# Altium PCB Switch Matrix PCB.PcbDoc (part 1 of 3)
Units mil, origin at the board's own origin, x right, y up, seen from the top; angles counter-clockwise.
Board outline 3937.01 x 7874.02 mil, 2 copper layers (Top Layer, Bottom Layer), stack 62.8 mil thick; 178 components, 222 nets, 852 pads, 317 vias.
Unrouted connection lines stored in the file: 1.
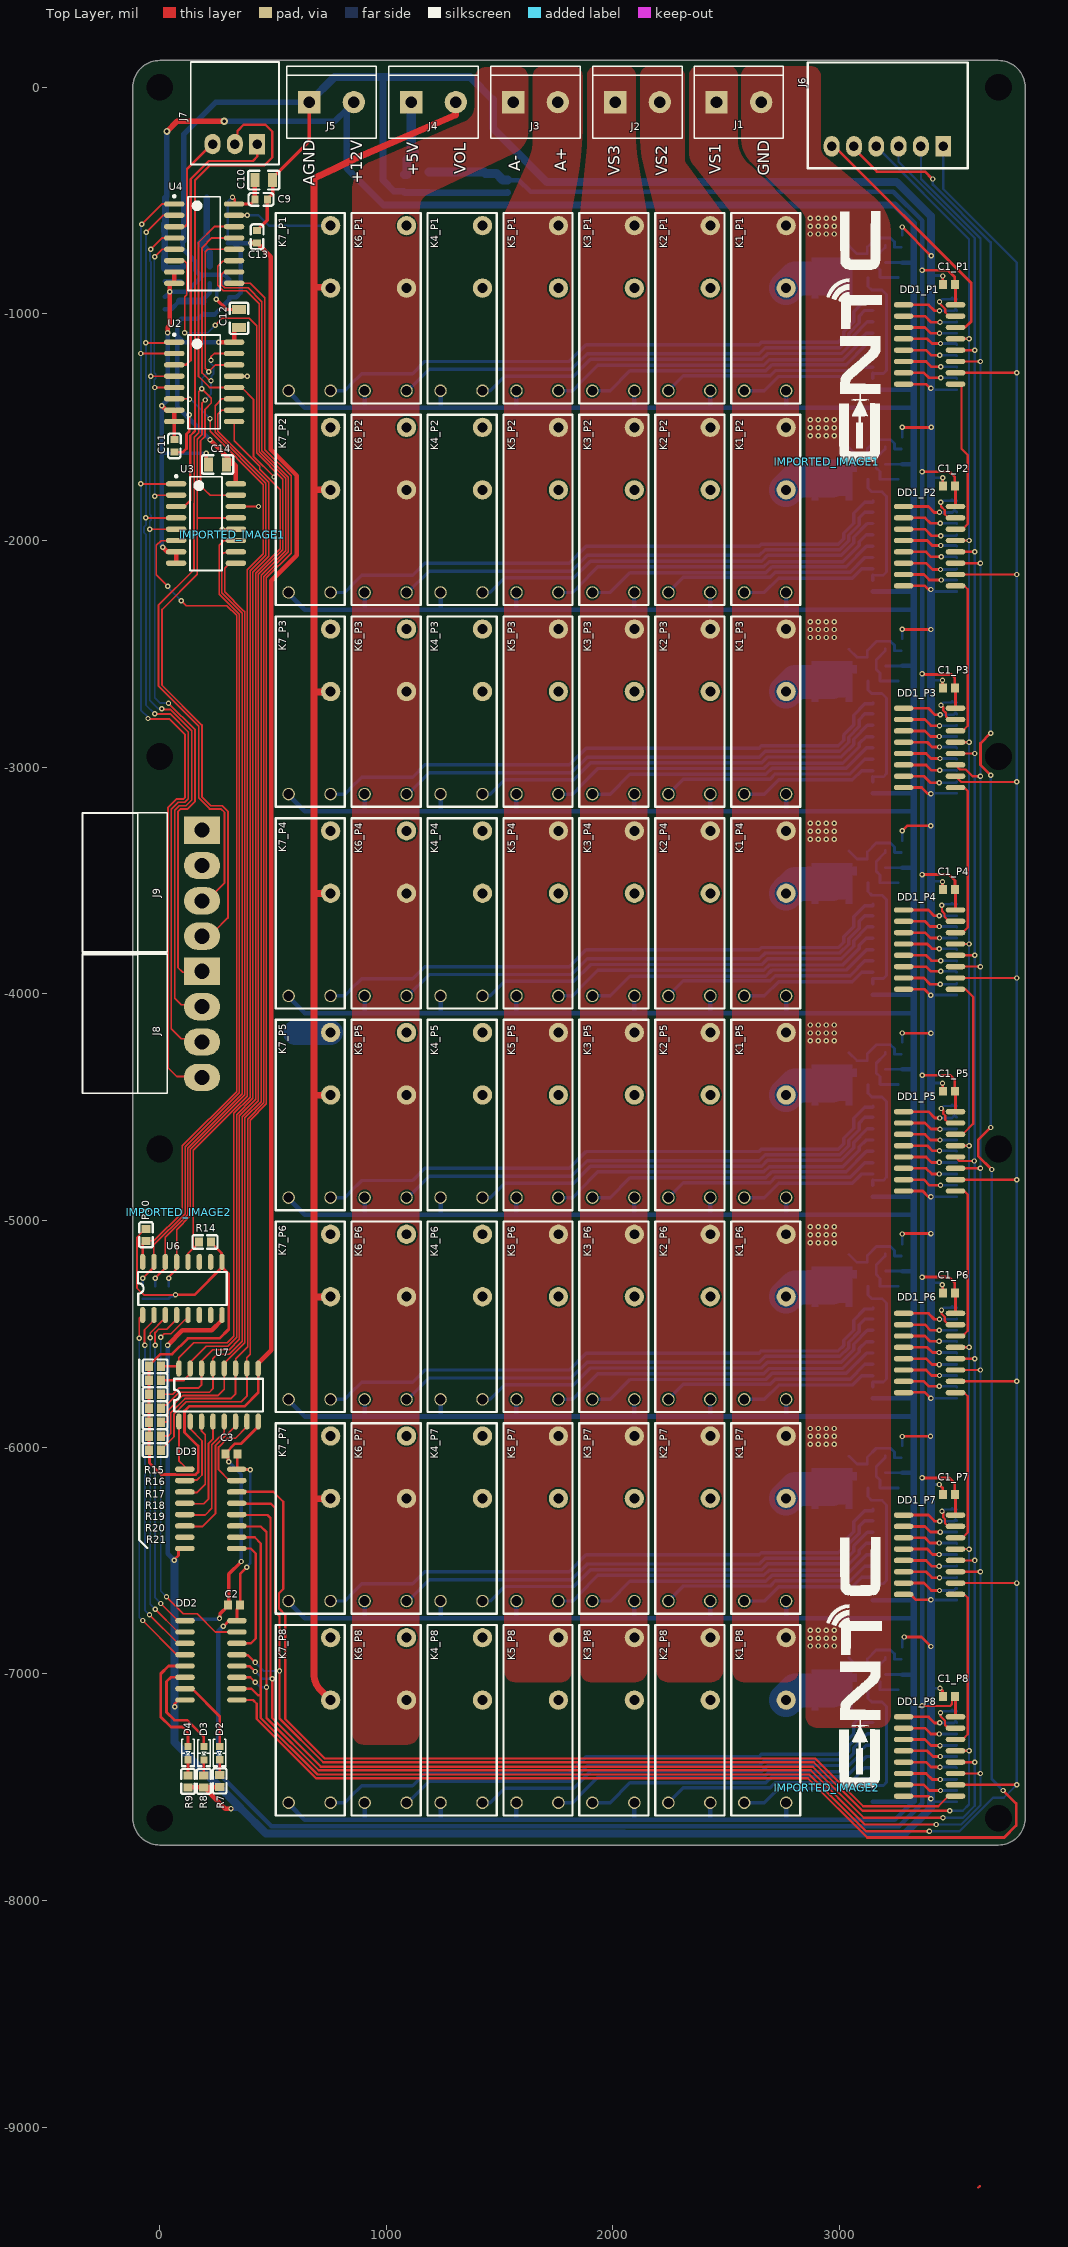
[diagram p0: Top Layer view]
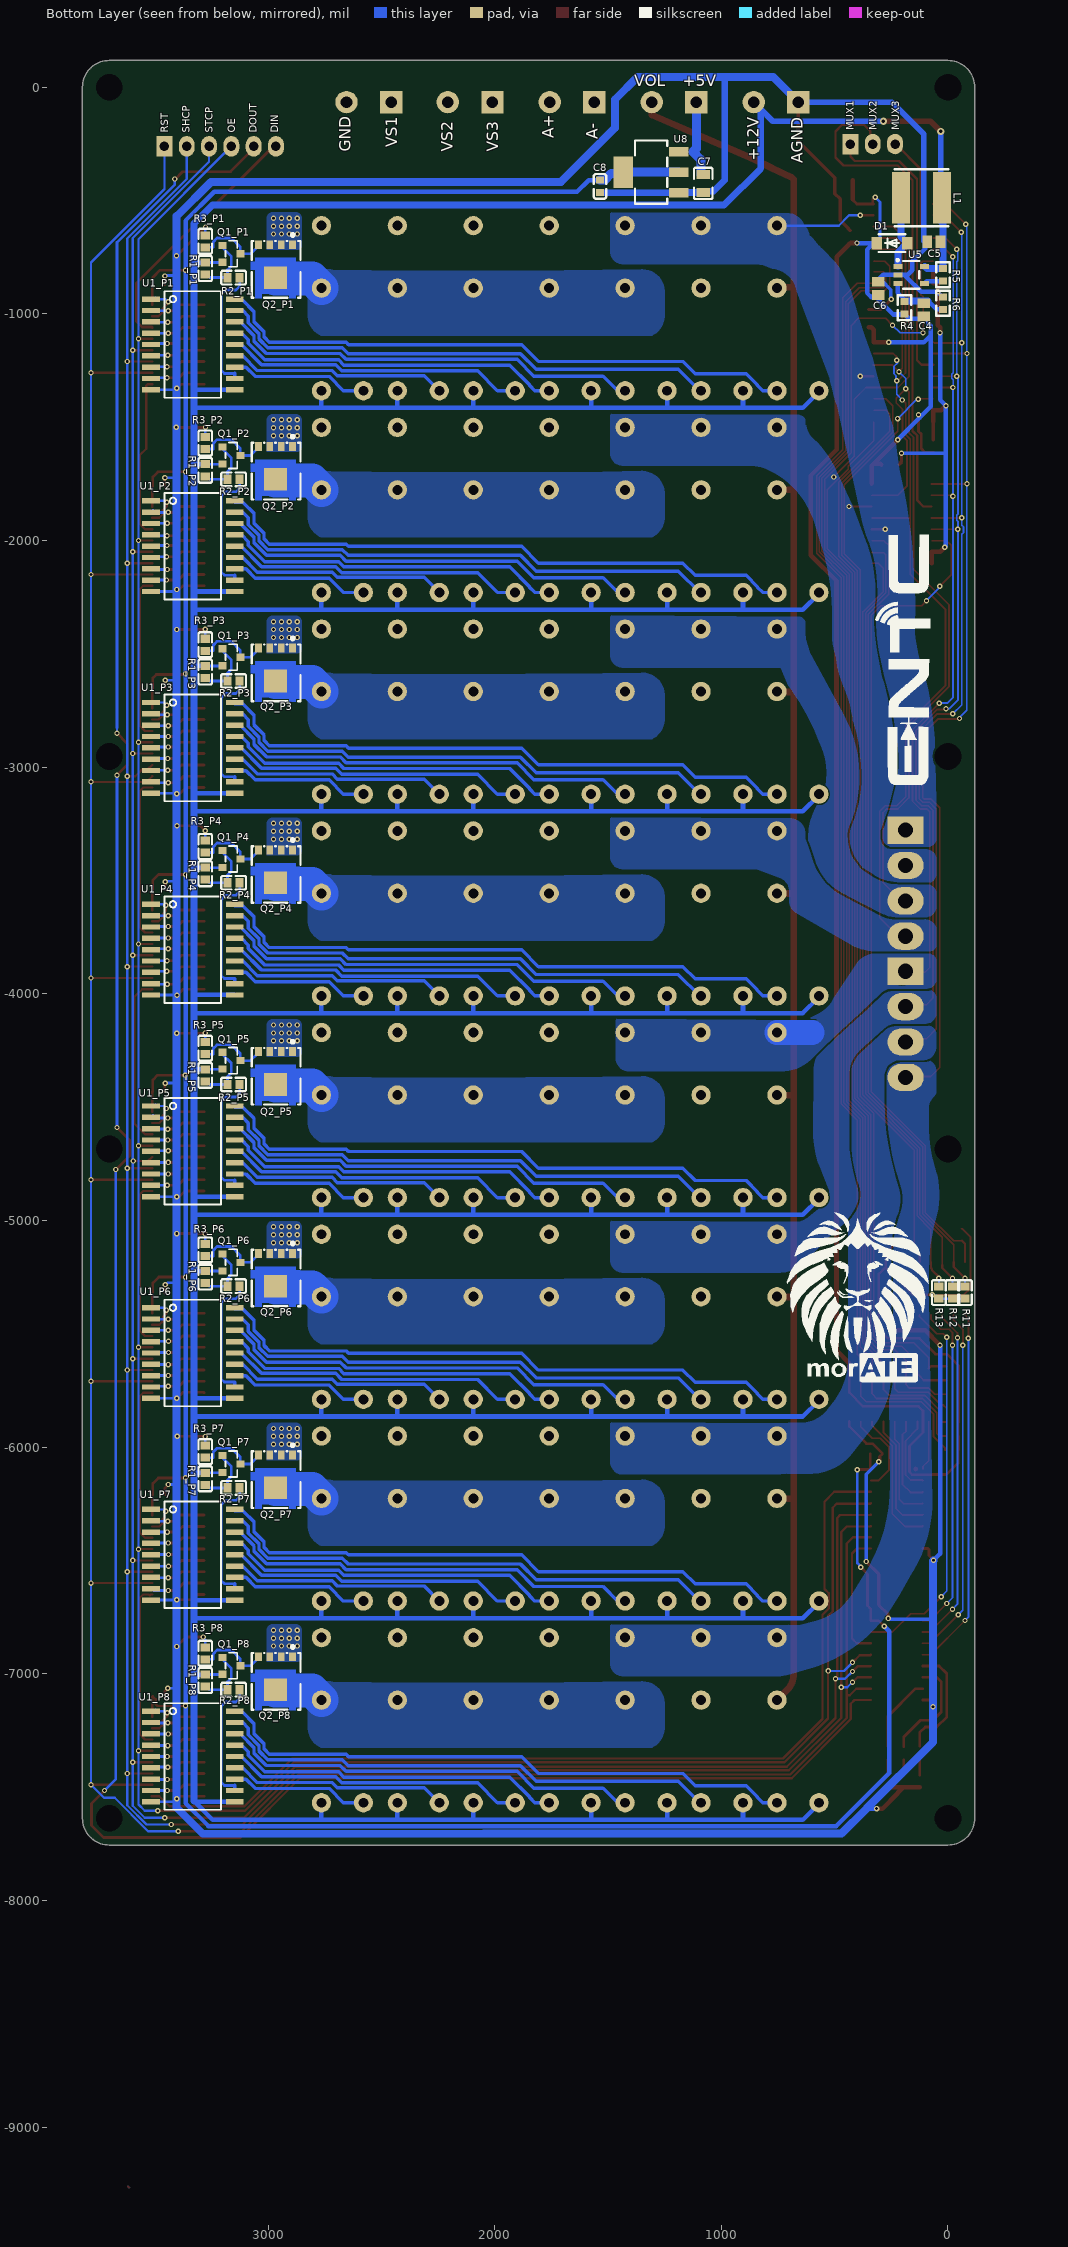
[diagram p1: Bottom Layer view, seen from below]
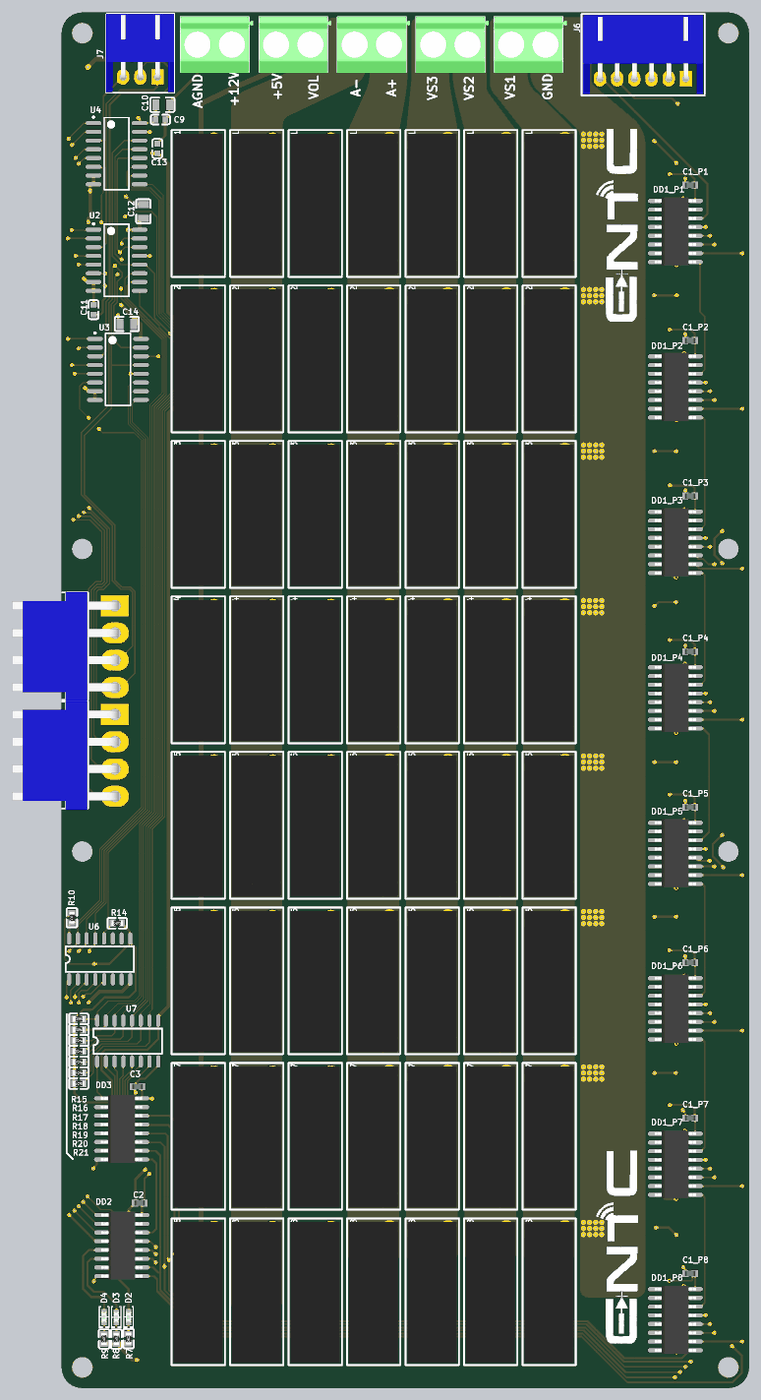
[diagram p4: 3D render of the assembled board from above, using the file's embedded part models]
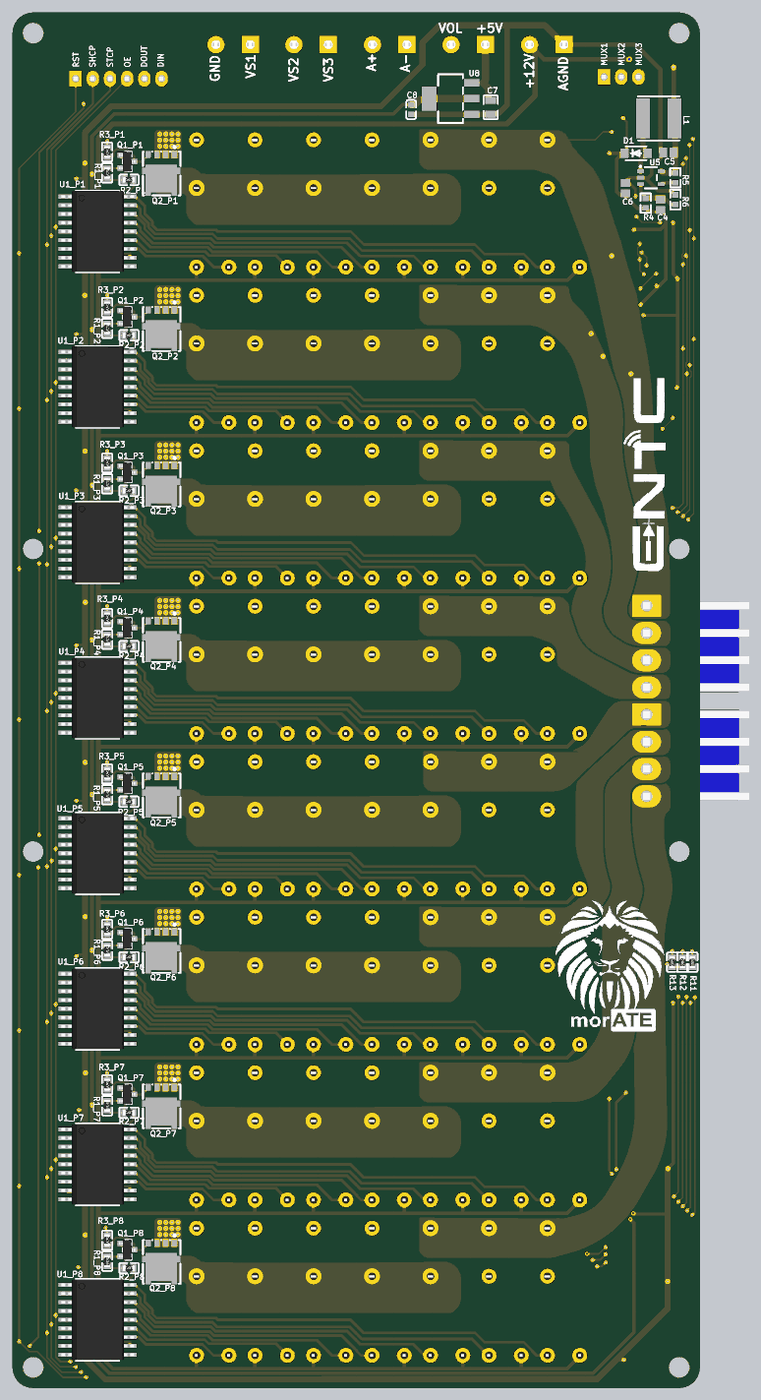
[diagram p5: 3D render of the assembled board from below, using the file's embedded part models]

## Layer stack, top to bottom
Top Solder: solder mask 1, Solder Resist, Dk 3.5
Top Layer: signal copper 1.4
Dielectric 1: core 60, FR-4, Dk 4.6
Bottom Layer: signal copper 1.4
Bottom Solder: solder mask 1, Solder Resist, Dk 3.5

## Board outline
0,-7755.91 cw(c0,-7637.8) -118.11,-7637.8 -118.11,0 cw(c0,0) 0,118.11 3700.79,118.11 cw(c3700.79,0) 3818.9,0 3818.9,-7637.8 cw(c3700.79,-7637.8) 3700.79,-7755.91

## Design rules (kind name [scope] priority, off if disabled: settings)
BoardOutlineClearance [All] p1: gap=7.87 ignorepadtopadclearanceinfootprint=FALSE
Clearance [All] p1: gap=6 ignorepadtopadclearanceinfootprint=FALSE except(5: Arc-Text Track-Text SMDPad-Text THPad-Text Via-Text Fill-Text Poly-Text Region-Text Text-Text; 7: Arc-THPad Track-THPad SMDPad-THPad THPad-THPad THPad-Via THPad-Fill THPad-Poly THPad-Region; 9.84: Arc-Hole Track-Hole SMDPad-Hole Via-Hole Fill-Hole Poly-Hole Region-Hole Text-Hole; 10: Fill-Fill Fill-Poly Fill-Region Poly-Poly Poly-Region Region-Region; 12.99: THPad-Hole)
ComponentClearance [All] p1: gap=0 collisioncheckmode=3 verticalgap=5 showdistances=TRUE
DiffPairsRouting [All] p1: maxlimit=10 minlimit=5 mostfreqgap=5 toplayer_minwidth=5 toplayer_maxwidth=1000 toplayer_prefwidth=5 bottomlayer_minwidth=5 bottomlayer_maxwidth=1000 bottomlayer_prefwidth=5 maxuncoupledlength=500
Height [All] p1: minheight=0 maxheight=71497.94 prefheight=500
HoleSize [All] p1: absolutevalues=TRUE maxlimit=248.03 minlimit=11.81 maxpercent=80.000 minpercent=20.000
HoleToHoleClearance [All] p1: gap=9.84 allowstackedmicrovias=FALSE
MinimumAnnularRing [All] p1: minimumring=5.12
MinimumSolderMaskSliver [All] p1: minsoldermaskwidth=0
PlaneClearance [All] p1: clearance=5
PlaneConnect PlaneConnectPowerPads [InPadClass('PowerPads')] p1: planeconnectstyle=Direct reliefexpansion=20 reliefentries=4 reliefconductorwidth=10 reliefairgap=10
PlaneConnect [All] p2: pad.planeconnectstyle=Relief pad.reliefexpansion=11.81 pad.reliefentries=4 pad.reliefconductorwidth=5 pad.reliefairgap=5 via.planeconnectstyle=Direct via.reliefexpansion=11.81 via.reliefentries=4 via.reliefconductorwidth=5 via.reliefairgap=5
PolygonConnect PolygonConnectPowerPads [All vs (InPadClass('PowerPads'))] p1: connectstyle=Direct reliefconductorwidth=10 reliefentries=4 polygonreliefangle="90 Angle" airgapwidth=10
PolygonConnect [All] p2: connectstyle=Direct reliefconductorwidth=5 reliefentries=4 polygonreliefangle="90 Angle" airgapwidth=5
RoomDefinition P8 [InComponentClass('P8')] p1: confinementstyle=ConfineIn formatcopy=TRUE lockcomponents=FALSE outline 491.89,-7645.91 3566.89,-7645.91 3566.89,-6765.91 491.89,-6765.91
RoomDefinition P7 [InComponentClass('P7')] p2: confinementstyle=ConfineIn formatcopy=TRUE lockcomponents=FALSE outline 491.89,-6755.91 3566.89,-6755.91 3566.89,-5875.91 491.89,-5875.91
RoomDefinition P6 [InComponentClass('P6')] p3: confinementstyle=ConfineIn formatcopy=TRUE lockcomponents=FALSE outline 491.89,-5865.91 3566.89,-5865.91 3566.89,-4985.91 491.89,-4985.91
RoomDefinition P5 [InComponentClass('P5')] p4: confinementstyle=ConfineIn formatcopy=TRUE lockcomponents=FALSE outline 491.89,-4975.91 3566.89,-4975.91 3566.89,-4095.91 491.89,-4095.91
RoomDefinition P4 [InComponentClass('P4')] p5: confinementstyle=ConfineIn formatcopy=TRUE lockcomponents=FALSE outline 491.89,-4085.91 3566.89,-4085.91 3566.89,-3205.91 491.89,-3205.91
RoomDefinition P3 [InComponentClass('P3')] p6: confinementstyle=ConfineIn formatcopy=TRUE lockcomponents=FALSE outline 491.89,-3195.91 3566.89,-3195.91 3566.89,-2315.91 491.89,-2315.91
RoomDefinition P2 [InComponentClass('P2')] p7: confinementstyle=ConfineIn formatcopy=TRUE lockcomponents=FALSE outline 491.89,-2305.91 3566.89,-2305.91 3566.89,-1425.91 491.89,-1425.91
RoomDefinition P1 [InComponentClass('P1')] p8: confinementstyle=ConfineIn formatcopy=TRUE lockcomponents=FALSE outline 491.89,-1415.91 3566.89,-1415.91 3566.89,-535.91 491.89,-535.91
RoutingVias [All] p1: holewidth=11.81 width=23.62 viastyle="Through Hole" minholewidth=11.81 minwidth=23.62 maxholewidth=23.62 maxwidth=259.84
SilkToBoardRegionClearance SilkToBoardRegionClearance_1 [All] p2:
SilkToSilkClearance [All] p1: silktosilkclearance=0
SilkToSolderMaskClearance [IsPad] p1: minsilkscreentomaskgap=5 clearancetoexposedcopper=TRUE
SolderMaskExpansion [All] p1: expansion=2.95
Width [All] p1: maxlimit=1000 minlimit=5 preferedwidth=10 minimp=50.000000 maximp=50.000000 favimp=50.000000
20 further rules are at their usual default settings.

## Classes and differential pairs
component class S: C4 C5 C6 D1 L1 R4 R5 R6 U5
channel class "Switch Line of One DC Pin": P1 P2 P3 P4 P5 P6 P7 P8
component class "Switch Matrix": C2 C3 C7 C8 C9 C10 C11 C12 C13 C14 D2 D3 D4 DD2 DD3 J1 J2 J3 J4 J5 J6 J7 J8 J9 R7 R8 R9 R10 R11 R12 R13 R14 R15 R16 R17 R18 R19 R20 R21 U2 U3 U4 U6 U7 U8
component class P8: C1_P8 DD1_P8 K1_P8 K2_P8 K3_P8 K4_P8 K5_P8 K6_P8 K7_P8 Q1_P8 Q2_P8 R1_P8 R2_P8 R3_P8 U1_P8
component class P7: C1_P7 DD1_P7 K1_P7 K2_P7 K3_P7 K4_P7 K5_P7 K6_P7 K7_P7 Q1_P7 Q2_P7 R1_P7 R2_P7 R3_P7 U1_P7
component class P6: C1_P6 DD1_P6 K1_P6 K2_P6 K3_P6 K4_P6 K5_P6 K6_P6 K7_P6 Q1_P6 Q2_P6 R1_P6 R2_P6 R3_P6 U1_P6
component class P5: C1_P5 DD1_P5 K1_P5 K2_P5 K3_P5 K4_P5 K5_P5 K6_P5 K7_P5 Q1_P5 Q2_P5 R1_P5 R2_P5 R3_P5 U1_P5
component class P4: C1_P4 DD1_P4 K1_P4 K2_P4 K3_P4 K4_P4 K5_P4 K6_P4 K7_P4 Q1_P4 Q2_P4 R1_P4 R2_P4 R3_P4 U1_P4
component class P3: C1_P3 DD1_P3 K1_P3 K2_P3 K3_P3 K4_P3 K5_P3 K6_P3 K7_P3 Q1_P3 Q2_P3 R1_P3 R2_P3 R3_P3 U1_P3
component class P2: C1_P2 DD1_P2 K1_P2 K2_P2 K3_P2 K4_P2 K5_P2 K6_P2 K7_P2 Q1_P2 Q2_P2 R1_P2 R2_P2 R3_P2 U1_P2
component class P1: C1_P1 DD1_P1 K1_P1 K2_P1 K3_P1 K4_P1 K5_P1 K6_P1 K7_P1 Q1_P1 Q2_P1 R1_P1 R2_P1 R3_P1 U1_P1

## Components (designator, comment, footprint, x,y, rotation, side; value= is the part's Value field where it differs from the comment)
C1_P1 "100nF" CAPC1608X09N 3481.89,-870.08 r0 top (schematic designator C1)
C1_P2 "100nF" CAPC1608X09N 3481.89,-1760.08 r0 top (schematic designator C1)
C1_P3 "100nF" CAPC1608X09N 3481.89,-2650.08 r0 top (schematic designator C1)
C1_P4 "100nF" CAPC1608X09N 3481.89,-3540.08 r0 top (schematic designator C1)
C1_P5 "100nF" CAPC1608X09N 3481.89,-4430.08 r0 top (schematic designator C1)
C1_P6 "100nF" CAPC1608X09N 3481.89,-5320.08 r0 top (schematic designator C1)
C1_P7 "100nF" CAPC1608X09N 3481.89,-6210.08 r0 top (schematic designator C1)
C1_P8 "100nF" CAPC1608X09N 3481.89,-7100.08 r0 top (schematic designator C1)
C2 "100nF" CAPC1608X09N 328.88,-6697.58 r0 top
C3 "100nF" CAPC1608X09N 316.38,-6030.08 r0 top
C4 "150pF" C0805#1 106.97,-982.8 r270 bottom
C5 "10uF" C0805#1 61.97,-682.8 r180 bottom
C6 "10uF" C0805#1 306.97,-887.8 r270 bottom
C7 "10uF" C0805#2 1080,-424.37 r90 bottom
C8 "22uF" C0603 1535,-437.44 r90 bottom
C9 "100nF" C0603 447.56,-495 r0 top
C10 "10uF" C0805#2 459.37,-410 r180 top
C11 "100nF" C0603 65,-1582.56 r90 top
C12 "10uF" C0805#2 350,-1020 r270 top
C13 "100nF" C0603 430,-660 r90 top
C14 "10uF" C0805#2 255.63,-1665 r0 top
D1 "MBR0530T1G" SOD-123_L2.8-W1.8-LS3.7-RD 246.97,-687.8 r180 bottom
D2 "Green" "LED 0603_1608 GREEN" 265,-7350 r270 top
D3 "Green" "LED 0603_1608 GREEN" 195,-7350.47 r270 top
D4 "Green" "LED 0603_1608 GREEN" 125,-7350 r270 top
DD1_P1 "SN74HC595D" PCB-72k1vk0k27b6qyyenbg0-1 3396.89,-1135.08 r0 top (schematic designator DD1)
DD1_P2 "SN74HC595D" PCB-72k1vk0k27b6qyyenbg0-1 3396.89,-2025.08 r0 top (schematic designator DD1)
DD1_P3 "SN74HC595D" PCB-72k1vk0k27b6qyyenbg0-1 3396.89,-2915.08 r0 top (schematic designator DD1)
DD1_P4 "SN74HC595D" PCB-72k1vk0k27b6qyyenbg0-1 3396.89,-3805.08 r0 top (schematic designator DD1)
DD1_P5 "SN74HC595D" PCB-72k1vk0k27b6qyyenbg0-1 3396.89,-4695.08 r0 top (schematic designator DD1)
DD1_P6 "SN74HC595D" PCB-72k1vk0k27b6qyyenbg0-1 3396.89,-5585.08 r0 top (schematic designator DD1)
DD1_P7 "SN74HC595D" PCB-72k1vk0k27b6qyyenbg0-1 3396.89,-6475.08 r0 top (schematic designator DD1)
DD1_P8 "SN74HC595D" PCB-72k1vk0k27b6qyyenbg0-1 3396.89,-7365.08 r0 top (schematic designator DD1)
DD2 "SN74HC595D" PCB-72k1vk0k27b6qyyenbg0-1 226.38,-6940.91 r0 top
DD3 "SN74HC595D" PCB-72k1vk0k27b6qyyenbg0-1 225.28,-6272.8 r0 top
IMPORTED_IMAGE1 "Comment" IMPORTED_IMAGE 320,-1975 r270 top (schematic designator IMPORTED_IMAGE)
IMPORTED_IMAGE1 "Comment" IMPORTED_IMAGE 2944,-1652 r90 top (schematic designator IMPORTED_IMAGE)
IMPORTED_IMAGE2 "Comment" IMPORTED_IMAGE 85.32,-4964.71 r0 top (schematic designator IMPORTED_IMAGE)
IMPORTED_IMAGE2 "Comment" IMPORTED_IMAGE 2944,-7502 r90 top (schematic designator IMPORTED_IMAGE)
J1 "DB126V-5.0-2P-GN" PCB-kiok1jlp9o9fcwf1wwvf-1 2555.32,-65.91 r180 top
J2 "DB126V-5.0-2P-GN" PCB-kiok1jlp9o9fcwf1wwvf-1 2108.46,-65.91 r180 top
J3 "DB126V-5.0-2P-GN" PCB-kiok1jlp9o9fcwf1wwvf-1 1658.46,-65.91 r180 top
J4 "DB126V-5.0-2P-GN" PCB-kiok1jlp9o9fcwf1wwvf-1 1208.46,-65.91 r180 top
J5 "DB126V-5.0-2P-GN" PCB-kiok1jlp9o9fcwf1wwvf-1 758.46,-65.91 r180 top
J6 "JST S6B-XH-A" "JST S6B-XH-A" 3790.04,-333.91 r0 top
J7 "CN-1P-M-R3" JST-S3B-XH-A(LF)(SN)_V 331.89,-250.91 r0 top
J8 "JST B4PS-VH(LF)(SN)" PCB-FV0N1QE7E7TW0OWZTE2C-1 186.89,-4134.86 r90 top locked
J9 "JST B4PS-VH(LF)(SN)" PCB-FV0N1QE7E7TW0OWZTE2C-1 186.89,-3511.95 r90 top locked
K1_P1 "5A Relay" PCB-EI6NOKN2IRSC2A7YT94X-1 2671.89,-975.08 r90 top (schematic designator K1)
K1_P2 "5A Relay" PCB-EI6NOKN2IRSC2A7YT94X-1 2671.89,-1865.08 r90 top (schematic designator K1)
K1_P3 "5A Relay" PCB-EI6NOKN2IRSC2A7YT94X-1 2671.89,-2755.08 r90 top (schematic designator K1)
K1_P4 "5A Relay" PCB-EI6NOKN2IRSC2A7YT94X-1 2671.89,-3645.08 r90 top (schematic designator K1)
K1_P5 "5A Relay" PCB-EI6NOKN2IRSC2A7YT94X-1 2671.89,-4535.08 r90 top (schematic designator K1)
K1_P6 "5A Relay" PCB-EI6NOKN2IRSC2A7YT94X-1 2671.89,-5425.08 r90 top (schematic designator K1)
K1_P7 "5A Relay" PCB-EI6NOKN2IRSC2A7YT94X-1 2671.89,-6315.08 r90 top (schematic designator K1)
K1_P8 "5A Relay" PCB-EI6NOKN2IRSC2A7YT94X-1 2671.89,-7205.08 r90 top (schematic designator K1)
K2_P1 "3A Relay" PCB-EI6NOKN2IRSC2A7YT94X-1 2336.89,-975.08 r90 top (schematic designator K2)
K2_P2 "3A Relay" PCB-EI6NOKN2IRSC2A7YT94X-1 2336.89,-1865.08 r90 top (schematic designator K2)
K2_P3 "3A Relay" PCB-EI6NOKN2IRSC2A7YT94X-1 2336.89,-2755.08 r90 top (schematic designator K2)
K2_P4 "3A Relay" PCB-EI6NOKN2IRSC2A7YT94X-1 2336.89,-3645.08 r90 top (schematic designator K2)
K2_P5 "3A Relay" PCB-EI6NOKN2IRSC2A7YT94X-1 2336.89,-4535.08 r90 top (schematic designator K2)
K2_P6 "3A Relay" PCB-EI6NOKN2IRSC2A7YT94X-1 2336.89,-5425.08 r90 top (schematic designator K2)
K2_P7 "3A Relay" PCB-EI6NOKN2IRSC2A7YT94X-1 2336.89,-6315.08 r90 top (schematic designator K2)
K2_P8 "3A Relay" PCB-EI6NOKN2IRSC2A7YT94X-1 2336.89,-7205.08 r90 top (schematic designator K2)
K3_P1 "3A Relay" PCB-EI6NOKN2IRSC2A7YT94X-1 2001.89,-975.08 r90 top (schematic designator K3)
K3_P2 "3A Relay" PCB-EI6NOKN2IRSC2A7YT94X-1 2001.89,-1865.08 r90 top (schematic designator K3)
K3_P3 "3A Relay" PCB-EI6NOKN2IRSC2A7YT94X-1 2001.89,-2755.08 r90 top (schematic designator K3)
K3_P4 "3A Relay" PCB-EI6NOKN2IRSC2A7YT94X-1 2001.89,-3645.08 r90 top (schematic designator K3)
K3_P5 "3A Relay" PCB-EI6NOKN2IRSC2A7YT94X-1 2001.89,-4535.08 r90 top (schematic designator K3)
K3_P6 "3A Relay" PCB-EI6NOKN2IRSC2A7YT94X-1 2001.89,-5425.08 r90 top (schematic designator K3)
K3_P7 "3A Relay" PCB-EI6NOKN2IRSC2A7YT94X-1 2001.89,-6315.08 r90 top (schematic designator K3)
K3_P8 "3A Relay" PCB-EI6NOKN2IRSC2A7YT94X-1 2001.89,-7205.08 r90 top (schematic designator K3)
K4_P1 "5A Relay" PCB-EI6NOKN2IRSC2A7YT94X-1 1331.89,-975.08 r90 top (schematic designator K4)
K4_P2 "5A Relay" PCB-EI6NOKN2IRSC2A7YT94X-1 1331.89,-1865.08 r90 top (schematic designator K4)
K4_P3 "5A Relay" PCB-EI6NOKN2IRSC2A7YT94X-1 1331.89,-2755.08 r90 top (schematic designator K4)
K4_P4 "5A Relay" PCB-EI6NOKN2IRSC2A7YT94X-1 1331.89,-3645.08 r90 top (schematic designator K4)
K4_P5 "5A Relay" PCB-EI6NOKN2IRSC2A7YT94X-1 1331.89,-4535.08 r90 top (schematic designator K4)
K4_P6 "5A Relay" PCB-EI6NOKN2IRSC2A7YT94X-1 1331.89,-5425.08 r90 top (schematic designator K4)
K4_P7 "5A Relay" PCB-EI6NOKN2IRSC2A7YT94X-1 1331.89,-6315.08 r90 top (schematic designator K4)
K4_P8 "5A Relay" PCB-EI6NOKN2IRSC2A7YT94X-1 1331.89,-7205.08 r90 top (schematic designator K4)
K5_P1 "5A Relay" PCB-EI6NOKN2IRSC2A7YT94X-1 1666.89,-975.08 r90 top (schematic designator K5)
K5_P2 "5A Relay" PCB-EI6NOKN2IRSC2A7YT94X-1 1666.89,-1865.08 r90 top (schematic designator K5)
K5_P3 "5A Relay" PCB-EI6NOKN2IRSC2A7YT94X-1 1666.89,-2755.08 r90 top (schematic designator K5)
K5_P4 "5A Relay" PCB-EI6NOKN2IRSC2A7YT94X-1 1666.89,-3645.08 r90 top (schematic designator K5)
K5_P5 "5A Relay" PCB-EI6NOKN2IRSC2A7YT94X-1 1666.89,-4535.08 r90 top (schematic designator K5)
K5_P6 "5A Relay" PCB-EI6NOKN2IRSC2A7YT94X-1 1666.89,-5425.08 r90 top (schematic designator K5)
K5_P7 "5A Relay" PCB-EI6NOKN2IRSC2A7YT94X-1 1666.89,-6315.08 r90 top (schematic designator K5)
K5_P8 "5A Relay" PCB-EI6NOKN2IRSC2A7YT94X-1 1666.89,-7205.08 r90 top (schematic designator K5)
K6_P1 "5A Relay" PCB-EI6NOKN2IRSC2A7YT94X-1 996.89,-975.08 r90 top (schematic designator K6)
K6_P2 "5A Relay" PCB-EI6NOKN2IRSC2A7YT94X-1 996.89,-1865.08 r90 top (schematic designator K6)
K6_P3 "5A Relay" PCB-EI6NOKN2IRSC2A7YT94X-1 996.89,-2755.08 r90 top (schematic designator K6)
K6_P4 "5A Relay" PCB-EI6NOKN2IRSC2A7YT94X-1 996.89,-3645.08 r90 top (schematic designator K6)
K6_P5 "5A Relay" PCB-EI6NOKN2IRSC2A7YT94X-1 996.89,-4535.08 r90 top (schematic designator K6)
K6_P6 "5A Relay" PCB-EI6NOKN2IRSC2A7YT94X-1 996.89,-5425.08 r90 top (schematic designator K6)
K6_P7 "5A Relay" PCB-EI6NOKN2IRSC2A7YT94X-1 996.89,-6315.08 r90 top (schematic designator K6)
K6_P8 "5A Relay" PCB-EI6NOKN2IRSC2A7YT94X-1 996.89,-7205.08 r90 top (schematic designator K6)
K7_P1 "3A Relay" PCB-EI6NOKN2IRSC2A7YT94X-1 661.89,-975.08 r90 top (schematic designator K7)
K7_P2 "3A Relay" PCB-EI6NOKN2IRSC2A7YT94X-1 661.89,-1865.08 r90 top (schematic designator K7)
K7_P3 "3A Relay" PCB-EI6NOKN2IRSC2A7YT94X-1 661.89,-2755.08 r90 top (schematic designator K7)
K7_P4 "3A Relay" PCB-EI6NOKN2IRSC2A7YT94X-1 661.89,-3645.08 r90 top (schematic designator K7)
K7_P5 "3A Relay" PCB-EI6NOKN2IRSC2A7YT94X-1 661.89,-4535.08 r90 top (schematic designator K7)
K7_P6 "3A Relay" PCB-EI6NOKN2IRSC2A7YT94X-1 661.89,-5425.08 r90 top (schematic designator K7)
K7_P7 "3A Relay" PCB-EI6NOKN2IRSC2A7YT94X-1 661.89,-6315.08 r90 top (schematic designator K7)
K7_P8 "3A Relay" PCB-EI6NOKN2IRSC2A7YT94X-1 661.89,-7205.08 r90 top (schematic designator K7)
L1 "10uH" IND-SMD_L6.0-W6.0 116.97,-487.8 r0 bottom
Q1_P1 "MMBT3906LT1G" SOT-23 3161.89,-735.08 r180 bottom (schematic designator Q1)
Q1_P2 "MMBT3906LT1G" SOT-23 3161.89,-1625.08 r180 bottom (schematic designator Q1)
Q1_P3 "MMBT3906LT1G" SOT-23 3161.89,-2515.08 r180 bottom (schematic designator Q1)
Q1_P4 "MMBT3906LT1G" SOT-23 3161.89,-3405.08 r180 bottom (schematic designator Q1)
Q1_P5 "MMBT3906LT1G" SOT-23 3161.89,-4295.08 r180 bottom (schematic designator Q1)
Q1_P6 "MMBT3906LT1G" SOT-23 3161.89,-5185.08 r180 bottom (schematic designator Q1)
Q1_P7 "MMBT3906LT1G" SOT-23 3161.89,-6075.08 r180 bottom (schematic designator Q1)
Q1_P8 "MMBT3906LT1G" SOT-23 3161.89,-6965.08 r180 bottom (schematic designator Q1)
Q2_P1 "NTMFS4C022NT1G" PCB-iok221h7g3hg093tnixb-1 2891.89,-695.08 r0 bottom (schematic designator Q2)
Q2_P2 "NTMFS4C022NT1G" PCB-iok221h7g3hg093tnixb-1 2891.89,-1585.08 r0 bottom (schematic designator Q2)
Q2_P3 "NTMFS4C022NT1G" PCB-iok221h7g3hg093tnixb-1 2891.89,-2475.08 r0 bottom (schematic designator Q2)
Q2_P4 "NTMFS4C022NT1G" PCB-iok221h7g3hg093tnixb-1 2891.89,-3365.08 r0 bottom (schematic designator Q2)
Q2_P5 "NTMFS4C022NT1G" PCB-iok221h7g3hg093tnixb-1 2891.89,-4255.08 r0 bottom (schematic designator Q2)
Q2_P6 "NTMFS4C022NT1G" PCB-iok221h7g3hg093tnixb-1 2891.89,-5145.08 r0 bottom (schematic designator Q2)
Q2_P7 "NTMFS4C022NT1G" PCB-iok221h7g3hg093tnixb-1 2891.89,-6035.08 r0 bottom (schematic designator Q2)
Q2_P8 "NTMFS4C022NT1G" PCB-iok221h7g3hg093tnixb-1 2891.89,-6925.08 r0 bottom (schematic designator Q2)
R1_P1 "47k" gen0603-2 3276.89,-800.08 r270 bottom (schematic designator R1)
R1_P2 "47k" gen0603-2 3276.89,-1690.08 r270 bottom (schematic designator R1)
R1_P3 "47k" gen0603-2 3276.89,-2580.08 r270 bottom (schematic designator R1)
R1_P4 "47k" gen0603-2 3276.89,-3470.08 r270 bottom (schematic designator R1)
R1_P5 "47k" gen0603-2 3276.89,-4360.08 r270 bottom (schematic designator R1)
R1_P6 "47k" gen0603-2 3276.89,-5250.08 r270 bottom (schematic designator R1)
R1_P7 "47k" gen0603-2 3276.89,-6140.08 r270 bottom (schematic designator R1)
R1_P8 "47k" gen0603-2 3276.89,-7030.08 r270 bottom (schematic designator R1)
R2_P1 "4.7k" gen0603-2 3151.89,-840.08 r180 bottom (schematic designator R2)
R2_P2 "4.7k" gen0603-2 3151.89,-1730.08 r180 bottom (schematic designator R2)
R2_P3 "4.7k" gen0603-2 3151.89,-2620.08 r180 bottom (schematic designator R2)
R2_P4 "4.7k" gen0603-2 3151.89,-3510.08 r180 bottom (schematic designator R2)
R2_P5 "4.7k" gen0603-2 3151.89,-4400.08 r180 bottom (schematic designator R2)
R2_P6 "4.7k" gen0603-2 3151.89,-5290.08 r180 bottom (schematic designator R2)
R2_P7 "4.7k" gen0603-2 3151.89,-6180.08 r180 bottom (schematic designator R2)
R2_P8 "4.7k" gen0603-2 3151.89,-7070.08 r180 bottom (schematic designator R2)
R3_P1 "4.7k" gen0603-2 3276.89,-680.08 r270 bottom (schematic designator R3)
R3_P2 "4.7k" gen0603-2 3276.89,-1570.08 r270 bottom (schematic designator R3)
R3_P3 "4.7k" gen0603-2 3276.89,-2460.08 r270 bottom (schematic designator R3)
R3_P4 "4.7k" gen0603-2 3276.89,-3350.08 r270 bottom (schematic designator R3)
R3_P5 "4.7k" gen0603-2 3276.89,-4240.08 r270 bottom (schematic designator R3)
R3_P6 "4.7k" gen0603-2 3276.89,-5130.08 r270 bottom (schematic designator R3)
R3_P7 "4.7k" gen0603-2 3276.89,-6020.08 r270 bottom (schematic designator R3)
R3_P8 "4.7k" gen0603-2 3276.89,-6910.08 r270 bottom (schematic designator R3)
R4 "205K" R0603 191.97,-972.8 r270 bottom
R5 "1M" R0603 21.97,-827.8 r90 bottom
R6 "13.3K" R0603 21.97,-952.8 r270 bottom
R7 "1k" gen0603-2 265,-7473.43 r90 top
R8 "1k" gen0603-2 195,-7475 r90 top
R9 "1k" gen0603-2 125,-7475 r90 top
R10 "10k" gen0603-2 -60,-5063.43 r90 top
R11 "10k" gen0603-2 -75,-5318.43 r270 bottom
R12 "10k" gen0603-2 -20,-5318.43 r270 bottom
R13 "10k" gen0603-2 40,-5318.43 r270 bottom
R14 "10k" gen0603-2 200,-5095 r0 top
R15 "10k" gen0603-2 -20,-5643.33 r180 top
R16 "10k" gen0603-2 -20,-5705 r180 top
R17 "10k" gen0603-2 -20,-5766.67 r180 top
R18 "10k" gen0603-2 -20,-5828.33 r180 top
R19 "10k" gen0603-2 -20,-5890 r180 top
R20 "10k" gen0603-2 -20,-5951.67 r180 top
R21 "10k" gen0603-2 -20,-6013.33 r180 top
U1_P1 "ULN2803A (SOIC-18)" PCB-gcdku7p92m9mz9ih2yin-1 3331.89,-1110.08 r180 bottom (schematic designator U1)
U1_P2 "ULN2803A (SOIC-18)" PCB-gcdku7p92m9mz9ih2yin-1 3331.89,-2000.08 r180 bottom (schematic designator U1)
U1_P3 "ULN2803A (SOIC-18)" PCB-gcdku7p92m9mz9ih2yin-1 3331.89,-2890.08 r180 bottom (schematic designator U1)
U1_P4 "ULN2803A (SOIC-18)" PCB-gcdku7p92m9mz9ih2yin-1 3331.89,-3780.08 r180 bottom (schematic designator U1)
U1_P5 "ULN2803A (SOIC-18)" PCB-gcdku7p92m9mz9ih2yin-1 3331.89,-4670.08 r180 bottom (schematic designator U1)
U1_P6 "ULN2803A (SOIC-18)" PCB-gcdku7p92m9mz9ih2yin-1 3331.89,-5560.08 r180 bottom (schematic designator U1)
U1_P7 "ULN2803A (SOIC-18)" PCB-gcdku7p92m9mz9ih2yin-1 3331.89,-6450.08 r180 bottom (schematic designator U1)
U1_P8 "ULN2803A (SOIC-18)" PCB-gcdku7p92m9mz9ih2yin-1 3331.89,-7340.08 r180 bottom (schematic designator U1)
U2 "Texas Instruments CD4051BNSR" PCB-xp4qbii5l2bbflfsgoli-1 196.38,-1300.08 r0 top
U3 "Texas Instruments CD4051BNSR" PCB-xp4qbii5l2bbflfsgoli-1 204.49,-1925.08 r0 top
U4 "Texas Instruments CD4051BNSR" PCB-xp4qbii5l2bbflfsgoli-1 196.38,-690.08 r0 top
U5 "LMR62014XMF" SOT-23-5_L3.0-W1.7-P0.95-LS2.8-BR 161.97,-827.8 r0 bottom
U6 "ULN2003ADR" SOIC-16_L9.9-W3.9-P1.27-LS6.0-BL 100,-5300 r0 top
U7 "ULN2003ADR" SOIC-16_L9.9-W3.9-P1.27-LS6.0-BL 260,-5770 r0 top
U8 "AZ1117CH-3.3TRG1" SOT-223-3_L6.5-W3.4-P2.30-LS7.0-BR 1310,-375 r180 bottom

## Footprints (in the part's own frame and the unit in brackets; to place one, negate y for a bottom-side part, rotate by r counter-clockwise, add the part's x,y. Pads: shape width x height; smd on the part's side, far side on the other; paste and mask are expansions set on the pad)
C0603 [mm]
  rect 0.8x0.9 smd: 1(-0.7,0) 2(0.7,0)
  silkscreen extent -1.4,-0.7 1.4,0.72
C0805#1 [mm] "Chip Capacitor, Body 2.0x1.3mm, IPC High Density"
  rect 1.1x1.4 smd: 1(-0.75,0) 2(0.75,0)
  body extent -1.1,-0.72 1.1,0.72, height 1.4
C0805#2 [mm]
  rect 1x1.55 smd: 1(-1,0) 2(1,0)
  silkscreen extent -1.75,-1.04 1.75,1.04
CAPC1608X09N [mm]
  rect 0.9x1 smd: 1(-0.675,0) 2(0.675,0)
  body extent -0.8,-0.4 0.8,0.4, height 0.45
gen0603-2 [mm]
  rect 0.9x1.05 smd: 1(-0.675,0) 2(0.675,0)
  silkscreen extent -1.4,-0.76 1.4,0.76, body extent -0.85,-0.4 0.85,0.4, height 0.59
IMPORTED_IMAGE [mil]
IND-SMD_L6.0-W6.0 [mm]
  rect 2x5.8 smd: 1(-2.3,0) 2(2.3,0)
  silkscreen extent -3,-3.2 3,3.2
"JST S6B-XH-A" [mil]
  rect 70x90 hole 42: 1(-332.87,73)
  oval 70x90 hole 42: 2(-431.3,73) 3(-529.72,73) 4(-628.15,73) 5(-726.57,73) 6(-825,73)
  silkscreen extent -930,-23 -225,443, body extent -920,-17 -235,436, height 242
JST-S3B-XH-A(LF)(SN)_V [mil]
  rect 70x90 hole 42: 1(98.43,0)
  oval 70x90 hole 42: 2(0,0) 3(-98.43,0)
  silkscreen extent -195,-91 195,362, body extent -195,-91 195,362, height 242
"LED 0603_1608 GREEN" [mm] "Chip Diode, 2-Leads, Body 1.60x0.80mm, IPC Medium Density"
  rect 0.8x0.8 smd: 1(-0.75,0) 2(0.75,0)
  silkscreen extent -1.52,-0.7 1.52,0.7, body extent -0.8,-0.4 0.8,0.4, height 0.53
PCB-72k1vk0k27b6qyyenbg0-1 [mm]
  oval 2.2x0.6 smd: 1(-2.908,4.445) 2(-2.908,3.175) 3(-2.908,1.905) 4(-2.908,0.635) 5(-2.908,-0.635) 6(-2.908,-1.905) 7(-2.908,-3.175) 8(-2.908,-4.445) 9(2.908,-4.445) 10(2.908,-3.175) 11(2.908,-1.905) 12(2.908,-0.635) 13(2.908,0.635) 14(2.908,1.905) 15(2.908,3.175) 16(2.908,4.445)
  body extent -3,-4.95 3,4.95, height 1.4
PCB-EI6NOKN2IRSC2A7YT94X-1 [mil]
  round 55 / inner round 85 / far side round 85 hole 44: 1(-364.17,-92.52) 4(-364.17,92.52)
  round 85 hole 44: 2(88.58,-92.52) 3(364.17,-92.52)
  silkscreen extent -420,-155 420,150, body extent -409,-143 399,140, height 602
PCB-FV0N1QE7E7TW0OWZTE2C-1 [mil]
  rect 120x160 hole 66.9: 1(233.95,0)
  oval 120x160 hole 66.9: 2(78.05,0) 3(-77.95,0) 4(-233.95,0)
  silkscreen extent -304,154 311,528, body extent -310,-22 311,587, height 335
PCB-gcdku7p92m9mz9ih2yin-1 [mm]
  rect 2x0.6 smd: 1(-4.7,4.445) 2(-4.7,3.175) 3(-4.7,1.905) 4(-4.7,0.635) 5(-4.7,-0.635) 6(-4.7,-1.905) 7(-4.7,-3.175) 8(-4.7,-4.445) 9(-4.7,-5.715) 10(4.7,-5.715) 11(4.7,-4.445) 12(4.7,-3.175) 13(4.7,-1.905) 14(4.7,-0.635) 15(4.7,0.635) 16(4.7,1.905) 17(4.7,3.175) 18(4.7,4.445)
  silkscreen extent -3.18,-6.6 3.18,5.33, body extent -5.28,-6.52 5.32,5.23, height 2.6
PCB-iok221h7g3hg093tnixb-1 [mm]
  rect 0.75x1 smd: 1(0,0) 2(1.27,0) 3(2.54,0) 4(3.81,0)
  rect 2.54x2.54 smd: 5(1.905,3.683)
  Top Layer region: -0.375,1.485 -0.375,1.91 -0.87,1.91 -0.87,2.815 -0.375,2.815 -0.375,6.015 0.375,6.015 0.375,5.515 3.435,5.515 3.435,6.015 4.185,6.015 4.185,2.815 4.68,2.815 4.68,1.91 4.185,1.91 4.185,1.485
  silkscreen extent -0.89,-1.22 4.57,5.94
PCB-kiok1jlp9o9fcwf1wwvf-1 [mm]
  round 2.5 hole 1.3: 1(-2.5,0)
  rect 2.5x2.5 hole 1.3: 2(2.5,0)
  silkscreen extent -5,-4.05 5,4.05, body extent -5.57,-4.08 5,4.07, height 10
PCB-xp4qbii5l2bbflfsgoli-1 [mm]
  oval 2.3x0.6 smd: 1(-3.35,4.445) 2(-3.35,3.175) 3(-3.35,1.905) 4(-3.35,0.635) 5(-3.35,-0.635) 6(-3.35,-1.905) 7(-3.35,-3.175) 8(-3.35,-4.445) 9(3.35,-4.445) 10(3.35,-3.175) 11(3.35,-1.905) 12(3.35,-0.635) 13(3.35,0.635) 14(3.35,1.905) 15(3.35,3.175) 16(3.35,4.445)
  silkscreen extent -3.47,-5.25 1.8,5.42, body extent -2.8,-5.25 2.8,5.25, height 2
R0603 [mm]
  rect 0.8x0.9 smd: 1(-0.7,0) 2(0.7,0)
  silkscreen extent -1.4,-0.75 1.4,0.76
SOD-123_L2.8-W1.8-LS3.7-RD [mm]
  rect 1.2x1.4 smd: 1(-1.7,0) 2(1.7,0)
  silkscreen extent -1.5,-1 1.5,1
SOIC-16_L9.9-W3.9-P1.27-LS6.0-BL [mil]
  oval 23.62x70.79 smd: 1(-175,-117) 2(-125,-117) 3(-75,-117) 4(-25,-117) 5(25,-117) 6(75,-117) 7(125,-117) 8(175,-117) 9(175,117) 10(125,117) 11(75,117) 12(25,117) 13(-25,117) 14(-75,117) 15(-125,117) 16(-175,117)
  silkscreen extent -196,-73 196,72
SOT-23 [mm]
  rect 0.9x0.8 smd: 1(-1,0.95) 2(-1,-0.95) 3(1,0)
  silkscreen extent -0.65,-1.46 0.65,1.46, body extent -1.19,-1.47 1.19,1.48, height 1.07
SOT-23-5_L3.0-W1.7-P0.95-LS2.8-BR [mm]
  rect 1x0.55 smd: 1(1.5,-0.95) 2(1.5,0) 3(1.5,0.95) 4(-1.5,0.95) 5(-1.5,-0.95)
  silkscreen extent -0.9,-1.78 1.65,1.55
SOT-223-3_L6.5-W3.4-P2.30-LS7.0-BR [mm]
  rect 2.2x1.1 smd: 1(3.099,-2.3) 2(3.099,0) 3(3.099,2.3)
  rect 2.2x3.5 smd: 4(-3.099,0)
  silkscreen extent -1.8,-3.55 1.8,3.55

## Part data
C1_P1 C1_P2 C1_P3 C1_P4 C1_P5 C1_P6 C1_P7 C1_P8 C2 C3: library part CMP-2f55e5122ad9f092-5, "0603 10 nF 50 V ± 10% Tolerance X7R Surface Mount Multilayer Ceramic Capacitor", Capacitance Tolerance=10%, Manufacture Part Number=CC0603KRX7R9BB104, Manufacturer=YAGEO, Package / Case=0603, Supplier Part Number=C14663, Voltage-Rated=50V, Capacitance=100nF, Supplier=LCSC
C4: Manufacture Part Number=CC0805JRNPO9BN151, Manufacturer=YAGEO, Supplier Part Number=C107111, nameAlias=Capacitance, spicePre=C, spiceSymbolName=CC0805JRNPO9BN151, Supplier=LCSC
C5 C6 C7 C10 C12 C14: Manufacture Part Number=CL21B106KOQNNNE, Manufacturer=SAMSUNG, Supplier Part Number=C95841, nameAlias=Capacitance, spicePre=C, spiceSymbolName=CL21B106KOQNNNE, Supplier=LCSC
C8: BOM_LCSC Assembly=Yes, Manufacture Part Number=CL10A226MP8NUNE, Manufacturer=SAMSUNG, Supplier Part Number=C86295, nameAlias=Capacitance, SMT Type=Extend, spicePre=C, spiceSymbolName=CL10A226MP8NUNE, Supplier=LCSC
C9 C11 C13: BOM_LCSC Assembly=Yes, Manufacture Part Number=CC0603KRX7R9BB104, Manufacturer=YAGEO, Supplier Part Number=C14663, nameAlias=Capacitance, SMT Type=Basic, spicePre=C, spiceSymbolName=CC0603KRX7R9BB104, Supplier=LCSC
D1: BOM_LCSC Assembly=Yes, Manufacturer=ON, Supplier Part Number=C82046, image=//image.lceda.cn/szlcsc/C82046.jpg, Manufacture Part Number=MBR0530T1G, SMT Type=Extend, spicePre=D, spiceSymbolName=MBR0530T1G, Supplier=LCSC
D2 D3 D4: library part TLMG1100-GS08, "LED GREEN 0603 SMD", Forward Voltage=2.8V, Manufacture Part Number=ORH-G36G, Manufacturer=Orient, Supplier Part Number=C205443, Color=Green, ComponentLink1Description=Datasheet, ComponentLink1URL=http://www.vishay.com/docs/83173/tlmb1100.pdf, ComponentLink2Description="DigiKey Link", ComponentLink2URL=http://digikey.com/product-detail/en/vishay-semiconductor-opto-division/TLMG1100-GS08/751-1165-1-ND/1681448, Supplier=LCSC
DD1_P1 DD1_P2 DD1_P3 DD1_P4 DD1_P5 DD1_P6 DD1_P7 DD1_P8 DD2 DD3: library part CMP-ded317d957220114-5, "Shift Register Single 8-Bit Serial to Serial/Parallel 16-Pin SOIC Tube", Manufacture Part Number=74HC595D,118, Manufacturer=Nexperia, Package / Case=SOIC-16_150mil, Supplier Part Number=C5947, Supplier=LCSC
J1 J2 J3 J4 J5: library part CMP-7ad9b3d37ed8a51e-5, "Block, Terminal; 13.5 A; 250 V; 5 mm; 26 to 16 AWG; 2; Screw; Solder; 4 kV; PA", Manufacturer=DIBO, Supplier Part Number=C395849, Manufacture Part Number=DB126V-5.0-2P-GN, Pin pitch=5.0mm, Supplier=LCSC
J6: library part CMP-239aeae271c2fc5d-12, "Socket; wire-board; male; PIN: 6; 2.5mm; THT; XH; 250V; 3A; -25÷85°C", Manufacture Part Number=S6B-XH-A(LF)(SN), Manufacturer="JST Sales America", Supplier Part Number=C157919, Voltage Rating (AC)="250 V", Lead-Free Status="Lead Free", Orientation="Right Angle", Supplier=LCSC
J7: library part CMP-656568-19, "Male Header, Pitch 2.5 mm, 1 x 3 Position, Height 6.1 mm, Tail Length 3.4 mm, -25 to 85 degC, RoHS, Bulk", Current Rating="3.00 A", Insulation Resistance="1.00 GO", Manufacture Part Number=S3B-XH-A(LF)(SN), Manufacturer="JST Sales America", Supplier Part Number=C157928, Gender=Male, Lead-Free Status="Lead Free", Mounting Style="Through Hole", Number of Contacts=3, PackageDescription="Male Header, Pitch 2.5 mm, 1 x 3 Position, Height 6.1 mm, Tail Length 3.4 mm", PackageReference=S3B-XH-A(LF)(SN), RoHS=Compliant, Supplier=LCSC
J8 J9: library part CMP-324efb47dcc6ed89-6, "Connector Header, VH Series, 4 Position, 3.96mm, 250V, 22-16 AWG, Side Entry, Natural", Current Rating="7.00 A", Manufacture Part Number=B8PS-VH(LF)(SN), Manufacturer="JST Sales America", Supplier Part Number=C157970, Pin pitch="3.96 mm", Supplier=LCSC
K1_P1 K1_P2 K1_P3 K1_P4 K1_P5 K1_P6 K1_P7 K1_P8 K4_P1 K4_P2 K4_P3 K4_P4 K4_P5 K4_P6 K4_P7 K4_P8 K5_P1 K5_P2 K5_P3 K5_P4 K5_P5 K5_P6 K5_P7 K5_P8 K6_P1 K6_P2 K6_P3 K6_P4 K6_P5 K6_P6 K6_P7 K6_P8: library part CMP-edc624afa9603201-3, "General Purpose Non Latching 12VDC SPST-NO 5A Through Hole Relays RoHS", Current-Rated=5A, Manufacture Part Number=HF46F/12-HS1, Manufacturer="HF(Xiamen Hongfa Electroacoustic)", Supplier Part Number=C3636, Supplier=LCSC
K2_P1 K2_P2 K2_P3 K2_P4 K2_P5 K2_P6 K2_P7 K2_P8 K3_P1 K3_P2 K3_P3 K3_P4 K3_P5 K3_P6 K3_P7 K3_P8 K7_P1 K7_P2 K7_P3 K7_P4 K7_P5 K7_P6 K7_P7 K7_P8: library part CMP-edc624afa9603201-3, "Power Relay 12VDC 3DC/5AAC SPST-NO( (20.5mm 7.2mm 15.3mm)) THT", Current-Rated=3A, Manufacture Part Number=G5NB-1A-E-DC12, Manufacturer="Omron Electronics", Supplier Part Number=C225714, Supplier=LCSC
L1: Manufacture Part Number=VLS6045EX-100M, Manufacturer=TDK, Supplier Part Number=C360734, Contributor=LCSC, nameAlias=Inductance, spicePre=L, spiceSymbolName=VLS6045EX-100M, Supplier=LCSC
Q1_P1 Q1_P2 Q1_P3 Q1_P4 Q1_P5 Q1_P6 Q1_P7 Q1_P8: library part CMP-857798-9, "Bipolar (BJT) Single Transistor, General Purpose, PNP, -40 V, 250 MHz, 225 mW, -200 mA, 300", Breakdown Voltage [Collector to Emitter]="-40.0 V", Current Rating="-200 mA", Manufacturer="ON Semiconductor", Package / Case=SOT-23, Supplier Part Number=C53444, Lifecycle Status=Active, Manufacture Part Number=MMBT3906LT1G, Mounting Style="Surface Mount", OctopartID=79f4b3b314a6a633, Polarity=PNP, REACH SVHC Compliance="No SVHC", RoHS=Compliant, Supplier=LCSC, Voltage Rating (DC)="-40.0 V"
Q2_P1 Q2_P2 Q2_P3 Q2_P4 Q2_P5 Q2_P6 Q2_P7 Q2_P8: library part CMP-42ac8f2778579d6b-1, "Power MOSFET 30V 136A 1.7 mOhm Single N?Channel SO?8FL", Manufacturer="ON Semiconductor", Supplier Part Number=C179623, Lead-Free Status="Lead Free", Lifecycle Status=Active, Manufacture Part Number=NTMFS4C022NT1G, OctopartID=42ac8f2778579d6b, Octopart URL=https://octopart.com/ntmfs4c022nt1g-on+semiconductor-75571101, RoHS=Compliant, Supplier=LCSC
R1_P1 R1_P2 R1_P3 R1_P4 R1_P5 R1_P6 R1_P7 R1_P8: library part CMP-1853278-27, "Surface Mount Thick Film Resistor, RC Series, 1 kohm, 100 mW, - 1%, 50 V, 0603 [1608 Metric]", Manufacture Part Number=0603WAF4702T5E, Manufacturer="UNI-ROYAL(Uniroyal Elec)", Package / Case=0603, Resistance Tolerance=1%, Supplier Part Number=C25819, Resistance=47k, Supplier=LCSC
R2_P1 R2_P2 R2_P3 R2_P4 R2_P5 R2_P6 R2_P7 R2_P8 R3_P1 R3_P2 R3_P3 R3_P4 R3_P5 R3_P6 R3_P7 R3_P8: library part CMP-1853278-27, "Surface Mount Thick Film Resistor, RC Series, 1 kohm, 100 mW, - 1%, 50 V, 0603 [1608 Metric]", Manufacture Part Number=RC0603FR-074K7L, Manufacturer=YAGEO, Package / Case=0603, Resistance Tolerance=1%, Supplier Part Number=C99782, Resistance=4.7k, Supplier=LCSC
R4: BOM_LCSC Assembly=Yes, Manufacture Part Number=0603WAF2053T5E, Manufacturer=UniOhm, Supplier Part Number=C22949, nameAlias="Resistance (Ohms)", SMT Type=Extend, spicePre=R, spiceSymbolName=0603WAF2053T5E, Supplier=LCSC
R5: BOM_LCSC Assembly=Yes, Manufacture Part Number=0603WAF1004T5E, Manufacturer=UniOhm, Supplier Part Number=C22935, nameAlias="Resistance (Ohms)", SMT Type=Basic, spicePre=R, spiceSymbolName=0603WAF1004T5E, Supplier=LCSC
R6: BOM_LCSC Assembly=Yes, Manufacture Part Number=0603WAF1332T5E, Manufacturer=UniOhm, Supplier Part Number=C25952, nameAlias="Resistance (Ohms)", SMT Type=Extend, spicePre=R, spiceSymbolName=0603WAF1332T5E, Supplier=LCSC
R7 R8 R9: library part CMP-1853278-27, Manufacture Part Number=RC0603FR-071KL, Manufacturer=YAGEO, Package / Case=0603, Resistance Tolerance=1%, Supplier Part Number=C22548, Resistance=1k, Supplier=LCSC
R10 R11 R12 R13 R14 R15 R16 R17 R18 R19 R20 R21: library part CMP-1853278-27, Manufacture Part Number=RC0603FR-0710KL, Manufacturer=YAGEO, Package / Case=0603, Resistance Tolerance=1%, Supplier Part Number=C98220, Resistance=10k, Supplier=LCSC
U1_P1 U1_P2 U1_P3 U1_P4 U1_P5 U1_P6 U1_P7 U1_P8: library part CMP-19353911-22, "Bipolar (BJT) Array Transistor, Darlington, NPN, 50 V, 500 mA, SOIC", Manufacture Part Number=ULN2803A, Manufacturer=Mixic, Package / Case=SOP-18_300mil, Supplier Part Number=C107219, Supplier=LCSC
U2 U3 U4: library part CMP-7a8fb3826b5da548-1, "20-V, 8: 1, 1-channel analog multiplexer with logic-level conversion 16-SO -55 to 125", Case/Package="PDIP, SOIC, SOP", Manufacture Part Number=CD4051BNSR, Manufacturer="Texas Instruments", Operating Temperature="-55.0 °C to 125 °C", Quiescent Current="80.0 nA", Supplier Part Number=C87646, Supply Current="100 µA", Supply Voltage (DC)="15.0 V", Voltage Nodes="10.0 V, 5.00 V, 15.0 V", Bandwidth="20.0 MHz", Lead-Free Status="Lead Free", Lifecycle Status=Active, Mounting Style="Surface Mount", Number of Bits=8, Number of Channels=8, Number of Circuits=1, Number of Pins=16, OctopartID=7a8fb3826b5da548, Octopart URL=https://octopart.com/cd4051bnsr-texas+instruments-472244, Packaging=SOIC-16_208mil, Polarity=Non-Inverting, Propagation Delay Max (tpd)="20.0 ns", RoHS=Compliant, Supplier=LCSC
U5: BOM_LCSC Assembly=Yes, Manufacturer=TI, Supplier Part Number=C55182, Manufacture Part Number=LMR62014XMF, SMT Type=Extend, spicePre=U, spiceSymbolName=LMR62014XMF, Supplier=LCSC
U6 U7: BOM_LCSC Assembly=Yes, Manufacturer=TI, Supplier Part Number=C7512, image=//image.lceda.cn/szlcsc/C7512.jpg, Manufacture Part Number=ULN2003ADR, SMT Type=Basic, spicePre=X, spiceSymbolName=ULN2003ADR, Supplier=LCSC
U8: BOM_LCSC Assembly=Yes, Manufacturer=DIODES, Supplier Part Number=C92102, Manufacture Part Number=AZ1117CH-3.3TRG1, SMT Type=Extend, spicePre=U, spiceSymbolName=AZ1117CH-3.3TRG1, Supplier=LCSC

## Free pads (board coordinates)
  round 60 hole 118.11 unplated: 1(0,-4685.04) 1(0,-2952.76) 1(3700.79,-4685.04) 1(3700.79,-2952.76)
  round 60 hole 118.11: 2(3700.79,0) 3(0,0) 3(3700.79,-7637.8) 4(0,-7637.8)

## Via types
v1: diameter 23.62, hole 11.81, Top Layer to Bottom Layer, 315 vias
v2: diameter 31.5, hole 15.75, Top Layer to Bottom Layer, 2 vias

## Nets (pads, with @x,y where several pads share a name; then routed paths per layer and width w, separated by ;. In a path a pad name is that pad's centre, name@x,y a point inside that pad or via, vN(x,y) a via of type N, cw(c..) or ccw(c..) an arc to the next point about the centre after c; other vN are vias at no path point)
+3.3V: C1_P1.2 C1_P2.2 C1_P3.2 C1_P4.2 C1_P5.2 C1_P6.2 C1_P7.2 C1_P8.2 C2.2 C3.2 C8.2 DD1_P1.16 DD1_P2.16 DD1_P3.16 DD1_P4.16 DD1_P5.16 DD1_P6.16 DD1_P7.16 DD1_P8.16 DD2.16 DD3.16 U8.2 U8.4 | length 16310.9
  Top Layer w10: v1(3364,-7142) 3488,-7142 3496,-7134 3496,-7112.54 C1_P8.2@3508.46,-7100.08
  Top Layer w12: v1(281,-6790) 283.14,-6790 307.23,-6765.91 DD2.16@340.87,-6765.91 340.87,-6714.14 355.45,-6699.55 355.45,-6559.55 v1(385,-6530) ; C3.2@342.95,-6030.08 342.95,-6095.01 339.97,-6098 340.87,-6098.9 398.9,-6098.9 v1(400,-6100) ; v1(3364,-6136) 3483.93,-6136 3508.46,-6160.54 C1_P7.2@3508.46,-6210.08 ; v1(3364,-5250) 3482,-5250 3508.46,-5276.46 C1_P6.2@3508.46,-5320.08 ; v1(3364,-3474) 3483,-3474 3509,-3500 3509,-3539.54 C1_P4.2@3508.46,-3540.08 ; v1(3364,-2588) 3367,-2591 3493,-2591 3508.46,-2606.46 C1_P3.2@3508.46,-2650.08 ; v1(3364,-1697) 3486,-1697 3508.46,-1719.46 C1_P2.2@3508.46,-1760.08 ; v1(3364,-807) 3477,-807 3508.46,-838.46 C1_P1.2@3508.46,-870.08 ; v1(3365,-4359) 3488,-4359 3508.46,-4379.46 C1_P5.2@3508.46,-4430.08 ; C1_P8.2@3508.46,-7100.08 3511.38,-7102.99 DD1_P8.16@3511.38,-7190.08 ; C1_P6.2@3508.46,-5320.08 3511.38,-5322.99 DD1_P6.16@3511.38,-5410.08 ; C1_P5.2@3508.46,-4430.08 3511.38,-4432.99 DD1_P5.16@3511.38,-4520.08 ; C1_P4.2@3508.46,-3540.08 3511.38,-3542.99 DD1_P4.16@3511.38,-3630.08 ; C1_P3.2@3508.46,-2650.08 3511.38,-2652.99 DD1_P3.16@3511.38,-2740.08 ; DD1_P7.16@3511.38,-6300.08 C1_P7.2@3511.38,-6212.99 ; DD1_P2.16@3511.38,-1850.08 C1_P2.2@3511.38,-1762.99 ; DD1_P1.16@3511.38,-960.08 C1_P1.2@3511.38,-872.99
  Bottom Layer w12: v1(385,-6530) 385,-6526.86 400,-6511.86 v1(400,-6100)
  Bottom Layer w20: v1(281,-6790) 259,-6812 259,-7438 493,-7672 3263,-7672 3364,-7571 v1(3364,-7142) v1(3364,-6136) v1(3364,-5250) v1(3364,-3474) v1(3364,-2588) v1(3364,-1697) v1(3364,-807) 3364,-588.35 3237.45,-461.8 1685,-461.8 1636.8,-461.8 1584.89,-409.89 C8.2@1535,-409.89
  Bottom Layer w40: U8.2@1188,-375 U8.4@1432,-375 1437,-380 1485,-380 1514.89,-409.89 C8.2@1535,-409.89
+5V: C7.2 J4.2 U8.3 | length 349.9
  Bottom Layer w40: C7.2@1080,-385 1090.2,-385 1090.51,-384.68 1090.51,-319.49 1125,-285 1110.04,-270.04 J4.2@1110.04,-65.91
+12V: C5.2 J5.1 K1_P1.1 K1_P2.1 K1_P3.1 K1_P4.1 K1_P5.1 K1_P6.1 K1_P7.1 K1_P8.1 K2_P1.1 K2_P2.1 K2_P3.1 K2_P4.1 K2_P5.1 K2_P6.1 K2_P7.1 K2_P8.1 K3_P1.1 K3_P2.1 K3_P3.1 K3_P4.1 K3_P5.1 K3_P6.1 K3_P7.1 K3_P8.1 K4_P1.4 K4_P2.4 K4_P3.4 K4_P4.4 K4_P5.4 K4_P6.4 K4_P7.4 K4_P8.4 K5_P1.4 K5_P2.4 K5_P3.4 K5_P4.4 K5_P5.4 K5_P6.4 K5_P7.4 K5_P8.4 K6_P1.4 K6_P2.4 K6_P3.4 K6_P4.4 K6_P5.4 K6_P6.4 K6_P7.4 K6_P8.4 K7_P1.4 K7_P2.4 K7_P3.4 K7_P4.4 K7_P5.4 K7_P6.4 K7_P7.4 K7_P8.4 L1.1 Q1_P1.2 Q1_P2.2 Q1_P3.2 Q1_P4.2 Q1_P5.2 Q1_P6.2 Q1_P7.2 Q1_P8.2 R1_P1.1 R1_P2.1 R1_P3.1 R1_P4.1 R1_P5.1 R1_P6.1 R1_P7.1 R1_P8.1 R5.2 U1_P1.10 U1_P2.10 U1_P3.10 U1_P4.10 U1_P5.10 U1_P6.10 U1_P7.10 U1_P8.10 U5.5 | length 39696.2
  Top Layer w25: v2(32,-195) 77,-150 v2(285,-150)
  Bottom Layer w12: 2764.41,-7642.6 2766.89,-7645.08 ; 2764.41,-6752.6 2766.89,-6755.08 ; 2764.41,-5862.6 2766.89,-5865.08 ; 2764.41,-4972.6 2766.89,-4975.08 ; 2764.41,-4082.6 2766.89,-4085.08 ; 2764.41,-3192.6 2766.89,-3195.08 ; 2764.41,-2302.6 2766.89,-2305.08 ; 2764.41,-1412.6 2766.89,-1415.08 ; Q1_P8.2@3202.28,-7003.5 R1_P8.1@3271.89,-7003.5 ; Q1_P7.2@3202.28,-6113.5 R1_P7.1@3271.89,-6113.5 ; Q1_P6.2@3202.28,-5223.5 R1_P6.1@3271.89,-5223.5 ; Q1_P5.2@3202.28,-4333.5 R1_P5.1@3271.89,-4333.5 ; Q1_P4.2@3202.28,-3443.5 R1_P4.1@3271.89,-3443.5 ; Q1_P3.2@3202.28,-2553.5 R1_P3.1@3271.89,-2553.5 ; Q1_P2.2@3202.28,-1663.5 R1_P2.1@3271.89,-1663.5 ; Q1_P1.2@3202.28,-773.5 R1_P1.1@3271.89,-773.5
  Bottom Layer w20: K7_P8.4@569.37,-7574.25 640.2,-7645.08 1239.37,-7645.08 ; K7_P7.4@569.37,-6684.25 640.2,-6755.08 1239.37,-6755.08 ; K7_P6.4@569.37,-5794.25 640.2,-5865.08 1239.37,-5865.08 ; K7_P5.4@569.37,-4904.25 640.2,-4975.08 1239.37,-4975.08 ; K7_P4.4@569.37,-4014.25 640.2,-4085.08 1239.37,-4085.08 ; K7_P3.4@569.37,-3124.25 640.2,-3195.08 1239.37,-3195.08 ; K7_P2.4@569.37,-2234.25 640.2,-2305.08 1239.37,-2305.08 ; K7_P1.4@569.37,-1344.25 640.2,-1415.08 1239.37,-1415.08 ; 904.37,-7642.6 K6_P8.4@904.37,-7569.25 ; 904.37,-6752.6 K6_P7.4@904.37,-6679.25 ; 904.37,-5862.6 K6_P6.4@904.37,-5789.25 ; 904.37,-4972.6 K6_P5.4@904.37,-4899.25 ; 904.37,-4082.6 K6_P4.4@904.37,-4009.25 ; 904.37,-3192.6 K6_P3.4@904.37,-3119.25 ; 904.37,-2302.6 K6_P2.4@904.37,-2229.25 ; 904.37,-1412.6 K6_P1.4@904.37,-1339.25 ; K4_P8.4@1239.37,-7569.25 1239.37,-7645.08 ; K4_P7.4@1239.37,-6679.25 1239.37,-6755.08 ; K4_P6.4@1239.37,-5789.25 1239.37,-5865.08 ; K4_P5.4@1239.37,-4899.25 1239.37,-4975.08 ; K4_P4.4@1239.37,-4009.25 1239.37,-4085.08 ; K4_P3.4@1239.37,-3119.25 1239.37,-3195.08 ; K4_P2.4@1239.37,-2229.25 1239.37,-2305.08 ; K4_P1.4@1239.37,-1339.25 1239.37,-1415.08 ; 1574.37,-7642.56 K5_P8.4@1574.37,-7569.25 ; 1574.37,-6752.56 K5_P7.4@1574.37,-6679.25 ; 1574.37,-5862.56 K5_P6.4@1574.37,-5789.25 ; 1574.37,-4972.56 K5_P5.4@1574.37,-4899.25 ; 1574.37,-4082.56 K5_P4.4@1574.37,-4009.25 ; 1574.37,-3192.56 K5_P3.4@1574.37,-3119.25 ; 1574.37,-2302.56 K5_P2.4@1574.37,-2229.25 ; 1574.37,-1412.56 K5_P1.4@1574.37,-1339.25 ; 2094.41,-7642.56 K3_P8.1@2094.41,-7569.25 ; 2094.41,-6752.56 K3_P7.1@2094.41,-6679.25 ; 2094.41,-5862.56 K3_P6.1@2094.41,-5789.25 ; 2094.41,-4972.56 K3_P5.1@2094.41,-4899.25 ; 2094.41,-4082.56 K3_P4.1@2094.41,-4009.25 ; 2094.41,-3192.56 K3_P3.1@2094.41,-3119.25 ; 2094.41,-2302.56 K3_P2.1@2094.41,-2229.25 ; 2094.41,-1412.56 K3_P1.1@2094.41,-1339.25 ; 2429.41,-7642.6 K2_P8.1@2429.41,-7569.25 ; 2429.41,-6752.6 K2_P7.1@2429.41,-6679.25 ; 2429.41,-5862.6 K2_P6.1@2429.41,-5789.25 ; 2429.41,-4972.6 K2_P5.1@2429.41,-4899.25 ; 2429.41,-4082.6 K2_P4.1@2429.41,-4009.25 ; 2429.41,-3192.6 K2_P3.1@2429.41,-3119.25 ; 2429.41,-2302.6 K2_P2.1@2429.41,-2229.25 ; 2429.41,-1412.6 K2_P1.1@2429.41,-1339.25 ; 2764.41,-7642.6 K1_P8.1@2764.41,-7569.25 ; 2764.41,-6752.6 K1_P7.1@2764.41,-6679.25 ; 2764.41,-5862.6 K1_P6.1@2764.41,-5789.25 ; 2764.41,-4972.6 K1_P5.1@2764.41,-4899.25 ; 2764.41,-4082.6 K1_P4.1@2764.41,-4009.25 ; 2764.41,-3192.6 K1_P3.1@2764.41,-3119.25 ; 2764.41,-2302.6 K1_P2.1@2764.41,-2229.25 ; 2764.41,-1412.6 K1_P1.1@2764.41,-1339.25 ; U1_P8.10@3146.85,-7565.08 3323.92,-7565.08 ; U1_P7.10@3146.85,-6675.08 3325.92,-6675.08 3327,-6674 ; U1_P6.10@3146.85,-5785.08 3324.92,-5785.08 3327,-5783 ; U1_P5.10@3146.85,-4895.08 3324.08,-4895.08 3327,-4898 ; U1_P4.10@3146.85,-4005.08 3324.08,-4005.08 3327,-4008 ; U1_P3.10@3146.85,-3115.08 3326.92,-3115.08 3327,-3115 ; U1_P2.10@3146.85,-2225.08 3321.08,-2225.08 3327,-2231 ; U1_P1.10@3146.85,-1335.08 3326.92,-1335.08 3327,-1335 ; R1_P8.1@3276.89,-7003.5 3327,-7003.5 ; R1_P7.1@3276.89,-6113.5 3327,-6113.5 ; R1_P6.1@3276.89,-5223.5 3327,-5223.5 ; R1_P5.1@3276.89,-4333.5 3327,-4333.5 ; R1_P4.1@3276.89,-3443.5 3327,-3443.5 ; R1_P3.1@3276.89,-2553.5 3327,-2553.5 ; R1_P2.1@3276.89,-1663.5 3327,-1663.5 ; R1_P1.1@3276.89,-773.5 3327,-773.5 ; 3327,-7562 3323.92,-7565.08 ; 3327,-6755.08 2766.89,-6755.08 1239.37,-6755.08 ; 3327,-5865.08 2766.89,-5865.08 1239.37,-5865.08 ; 3327,-4975.08 2766.89,-4975.08 1239.37,-4975.08 ; 3327,-4085.08 2766.89,-4085.08 1239.37,-4085.08 ; 3327,-3195.08 2766.89,-3195.08 1239.37,-3195.08 ; 3327,-2305.08 2766.89,-2305.08 1239.37,-2305.08 ; 3327,-1415.08 2766.89,-1415.08 1239.37,-1415.08 ; 1239.37,-7645.08 2766.89,-7645.08 3243.92,-7645.08 3323.92,-7565.08
  Bottom Layer w25: L1.1@26.42,-487.8 32,-482.16 v2(32,-195) ; v2(285,-150) 772.8,-150 825.9,-96.9 J5.1@856.89,-65.91
  Bottom Layer w30: R5.2@21.97,-800.24 93.08,-800.23 U5.5@102.91,-790.39 ; R5.2@21.97,-800.24 22.57,-682.8 21.97,-602.8 26.37,-598.4 L1.1@26.42,-487.8 ; J5.1@825.9,-96.9 825.9,-357.91 987.99,-520 3245,-520 3327,-602 3327,-773.5 3327,-1335 3327,-1415.08 3327,-1663.5 3327,-2231 3327,-2305.08 3327,-2553.5 3327,-3115 3327,-3195.08 3327,-3443.5 3327,-4008 3327,-4085.08 3327,-4333.5 3327,-4898 3327,-4975.08 3327,-5223.5 3327,-5783 3327,-5865.08 3327,-6113.5 3327,-6674 3327,-6755.08 3327,-7003.5 3327,-7562
+20V: C4.2 C6.2 C9.1 C10.2 C11.1 C12.2 C13.1 C14.2 D1.1 R4.2 R10.2 R11.2 R12.2 R13.2 R14.2 R15.2 R16.2 R17.2 R18.2 R19.2 R20.2 R21.2 U2.16 U3.16 U4.16 U6.9 U7.9 | length 10801.7
  Top Layer w8: R10.2@-60,-5036.85 -62.95,-5036.85 -100,-5073.9 -100,-5298.62 -70.19,-5328.43 v1(70,-5328.43) ; U4.16@328.27,-515.08 U4.16@331.38,-511.97
  Top Layer w12: C11.1@65,-1610.11 102.89,-1610.11 118,-1595 118,-1530.95 130,-1518.95 v1(130,-1445) ; v1(70,-5328.43) 153.16,-5328.43 U6.9@275,-5206.58 ; R14.2@226.57,-5095 226.57,-5097.95 272.78,-5144.15 272.78,-5180.78 U6.9@275,-5183 U6.9@275,-5206.58 ; v1(321.38,-485.08) 331.38,-495.08 U4.16@331.38,-511.97 ; U4.16@328.27,-515.08 401.89,-515.08 420,-496.97 C9.1@420,-495 ; U7.9@435,-5653 435,-5760 375,-5820 130,-5820 110,-5840 110,-5935 170,-5995 170,-6110 158.39,-6121.61 69.43,-6121.61 68.91,-6121.09 6.09,-6121.09 -45,-6070 -45,-6014.91 R21.2@-46.57,-6013.33 -46.57,-6006.57 -45,-6005 -46.57,-6003.43 R20.2@-46.57,-5951.67 -45,-5950.09 -45,-5891.57 R19.2@-46.57,-5890 R18.2@-46.57,-5828.33 R17.2@-46.57,-5766.67 R16.2@-46.57,-5705 R15.2@-46.57,-5643.33 -46.57,-5640.38 3.81,-5590 55,-5590 125,-5520 265,-5520 305,-5480 305,-5236.58 U6.9@275,-5206.58
  Top Layer w20: v1(222.05,-1555.06) 222.05,-1556.07 327.75,-1661.77 ; v1(261,-1126) 261.46,-1125.54 327.81,-1125.54 U2.16@328.27,-1125.08 328.27,-1070.27 339.17,-1059.37 C12.2@350,-1059.37 ; C14.2@295,-1665 298.23,-1661.77 327.75,-1661.77 ; U3.16@336.38,-1750.08 336.38,-1670.4 327.75,-1661.77 ; v1(401.59,-687.11) 401.81,-687.33 429.78,-687.33 C13.1@430,-687.56 431.97,-687.56 437.72,-693.3 437.72,-695.27 490,-747.56 490,-1598.49 605,-1713.49 605,-2065 491.89,-2178.11 491.89,-5572.53 435,-5629.42 U7.9@435,-5653 ; C9.1@420,-495 C10.2@420,-410
  Bottom Layer w12: R11.2@-75,-5345 R12.2@-20,-5345 R13.2@40,-5345 51.72,-5333.28 v1@62,-5333.28 ; D1.1@300,-687.8 300,-506.46 v1(321.38,-485.08)
  Bottom Layer w20: v1@127.78,-1447.22 125.51,-1449.49 125.51,-1458.51 ; R4.2@191.97,-1000.4 191.97,-1002.8 241.97,-1002.8 306.97,-937.8 306.97,-927.2 337.57,-927.2 356.97,-907.8 356.97,-717.8 D1.1@326.97,-687.8 ; R4.2@191.97,-1000.36 170.16,-1022.17 96.14,-1022.17 86.46,-1031.85 86.46,-1042.68 77,-1052.13 77,-1096 ; v1(222.05,-1555.06) 125.51,-1458.51 ; v1(261,-1126) 260,-1125 106,-1125 77,-1096 ; D1.1@300,-687.8 D1.1@313.9,-687.8 400.91,-687.8 v1(401.59,-687.11) ; 77,-1096 77,-1410 125.51,-1458.51
A+: J3.1 K5_P1.3 K5_P2.3 K5_P3.3 K5_P4.3 K5_P5.3 K5_P6.3 K5_P7.3 K5_P8.3
A-: J3.2 K6_P1.2 K6_P2.2 K6_P3.2 K6_P4.2 K6_P5.2 K6_P6.2 K6_P7.2 K6_P8.2
DC_PIN1: J9.1 K4_P1.3 K6_P1.3 K7_P1.3 U2.13 U3.12 U4.15 | length 565.5
  Top Layer w10: v1(276.38,-1950.08) U3.12@336.38,-1950.08 ; U2.13@328.27,-1275.08 v1(386.38,-1275.08) ; U4.15@328.27,-565.08 v1(386.38,-565.08) ; K7_P1.3@754.41,-610.91 755.55,-610.91 K7_P1.3@756.38,-610.08
  Bottom Layer w10: v1(386.38,-565.08) 436.38,-565.08 482.21,-610.91 K7_P1.3@754.41,-610.91
DC_PIN2: J9.2 K4_P2.3 K6_P2.3 K7_P2.3 U2.12 U3.14 U4.14 | length 1542.9
  Top Layer w8: U4.14@328.27,-615.08 241.38,-615.08 171.38,-685.08 171.38,-1275.92 220.53,-1325.08 U2.12@328.27,-1325.08 361.73,-1325.08 413.65,-1376.99 413.65,-1627.96 504.38,-1718.69 v1(504.38,-1720.08) ; U3.14@336.38,-1850.08 v1(436.38,-1850.08)
  Bottom Layer w8: K7_P2.3@753.01,-1500.91 K7_P2.3@754.41,-1500.91
DC_PIN3: J9.3 K4_P3.3 K6_P3.3 K7_P3.3 U2.14 U3.15 U4.12 | length 4065.4
  Top Layer w8: J9.3@186.38,-3590.08 206.72,-3590.08 286.38,-3510.42 286.38,-3200.08 270.38,-3184.08 220.58,-3184.08 172.38,-3135.88 172.38,-2820.23 -4.69,-2643.17 -4.43,-2284.34 151.83,-2128.08 151.83,-2123.08 152.25,-1545 172.25,-1525 172.38,-1344.08 v1(186.38,-1330.08) 228.06,-1371.77 228.06,-1393.39 200.57,-1420.89 200.57,-1498.04 200.55,-1517.75 200.38,-1517.92 200.38,-1540.19 180.24,-1560.33 180.24,-1757.91 200.21,-1777.92 222.38,-1800.08 U3.15@336.38,-1800.08 ; U4.12@328.27,-715.08 211.38,-715.08 201.38,-725.08 201.38,-1240.08 v1(216.38,-1255.08) 221.38,-1255.08 221.38,-1250.08 246.38,-1225.08 U2.14@328.27,-1225.08 U2.14@331.38,-1225.08
  Bottom Layer w8: v1(186.38,-1330.08) 186.38,-1285.08 v1(216.38,-1255.08)
DC_PIN4: J9.4 K4_P4.3 K6_P4.3 K7_P4.3 U2.15 U3.13 U4.13 | length 3906.7
  Top Layer w8: 186.25,-1526.19 186.25,-1523.6 186.28,-1492.54 186.38,-1492.43 186.38,-1395.08 v1(201.38,-1380.08) ; J9.4@186.38,-3750.08 211.98,-3724.48 241.98,-3724.48 301.38,-3665.08 301.38,-3195.08 276.38,-3170.08 226.38,-3170.08 186.38,-3130.08 186.38,-2814.43 10.38,-2638.43 10.38,-2304.62 166.24,-2148.76 166.24,-1900.08 ; 186.38,-1524.89 186.38,-1533.62 166.24,-1553.76 166.24,-1900.08 ; 215.38,-1289.08 187.38,-1261.08 187.38,-708.08 230.38,-665.08 U4.13@328.27,-665.08 ; v1(226.38,-1205.08) 226.38,-1190.08 241.38,-1175.08 U2.15@326.38,-1175.08 ; U3.13@336.38,-1900.08 166.24,-1900.08
  Bottom Layer w8: v1(201.38,-1380.08) 226.38,-1355.08 v1(226.38,-1295.08) 229.37,-1292.09 229.37,-1272.94 238.19,-1264.11 238.19,-1231.89 222.19,-1215.89 223.39,-1214.7 223.39,-1208.07 v1(226.38,-1205.08)